# Altium PCB main_PCB.PcbDoc
Units mil, origin at the board's own origin, x right, y up, seen from the top; angles counter-clockwise.
Board outline 2000 x 1574.8 mil, 2 copper layers (Top Layer, Bottom Layer); 9 components, 9 nets, 76 pads, 2 vias.
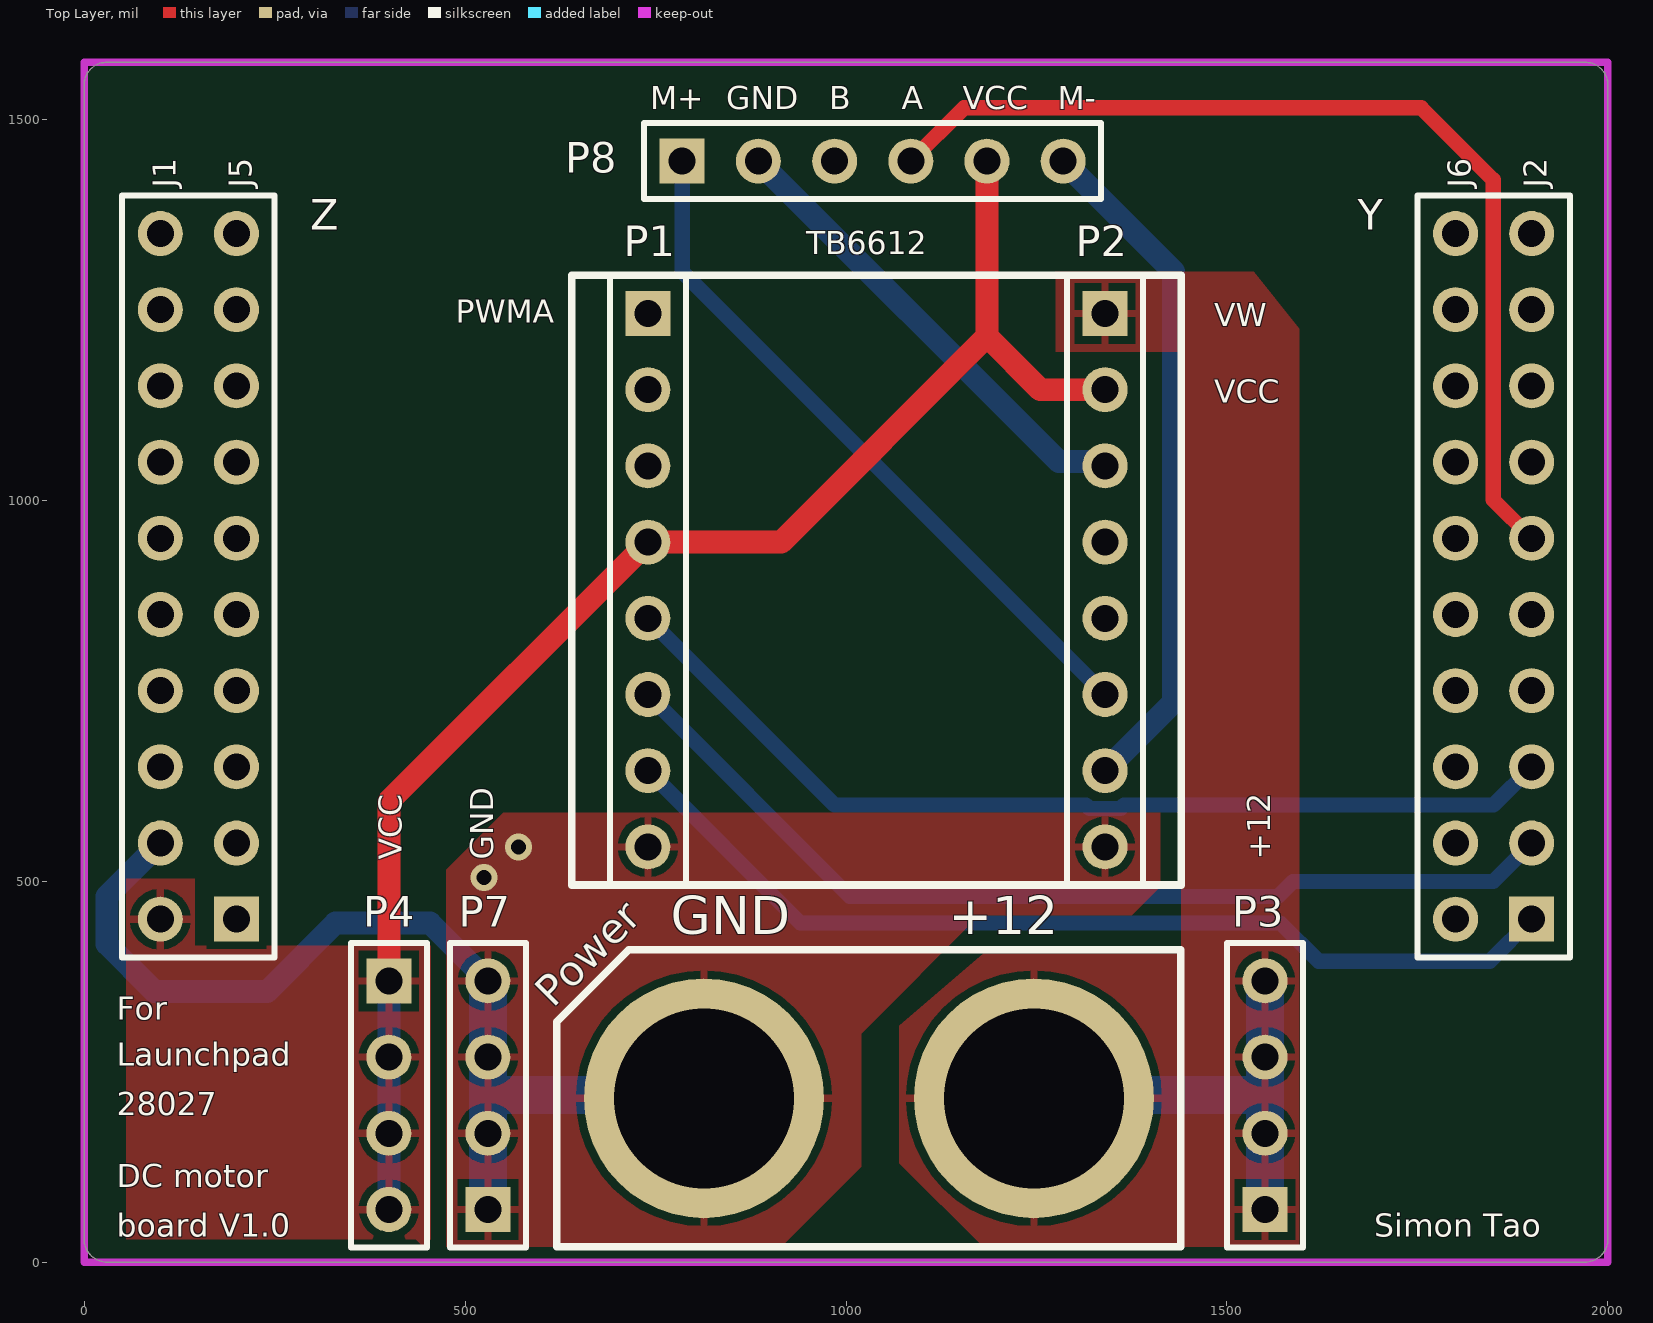
[diagram p0: Top Layer view]
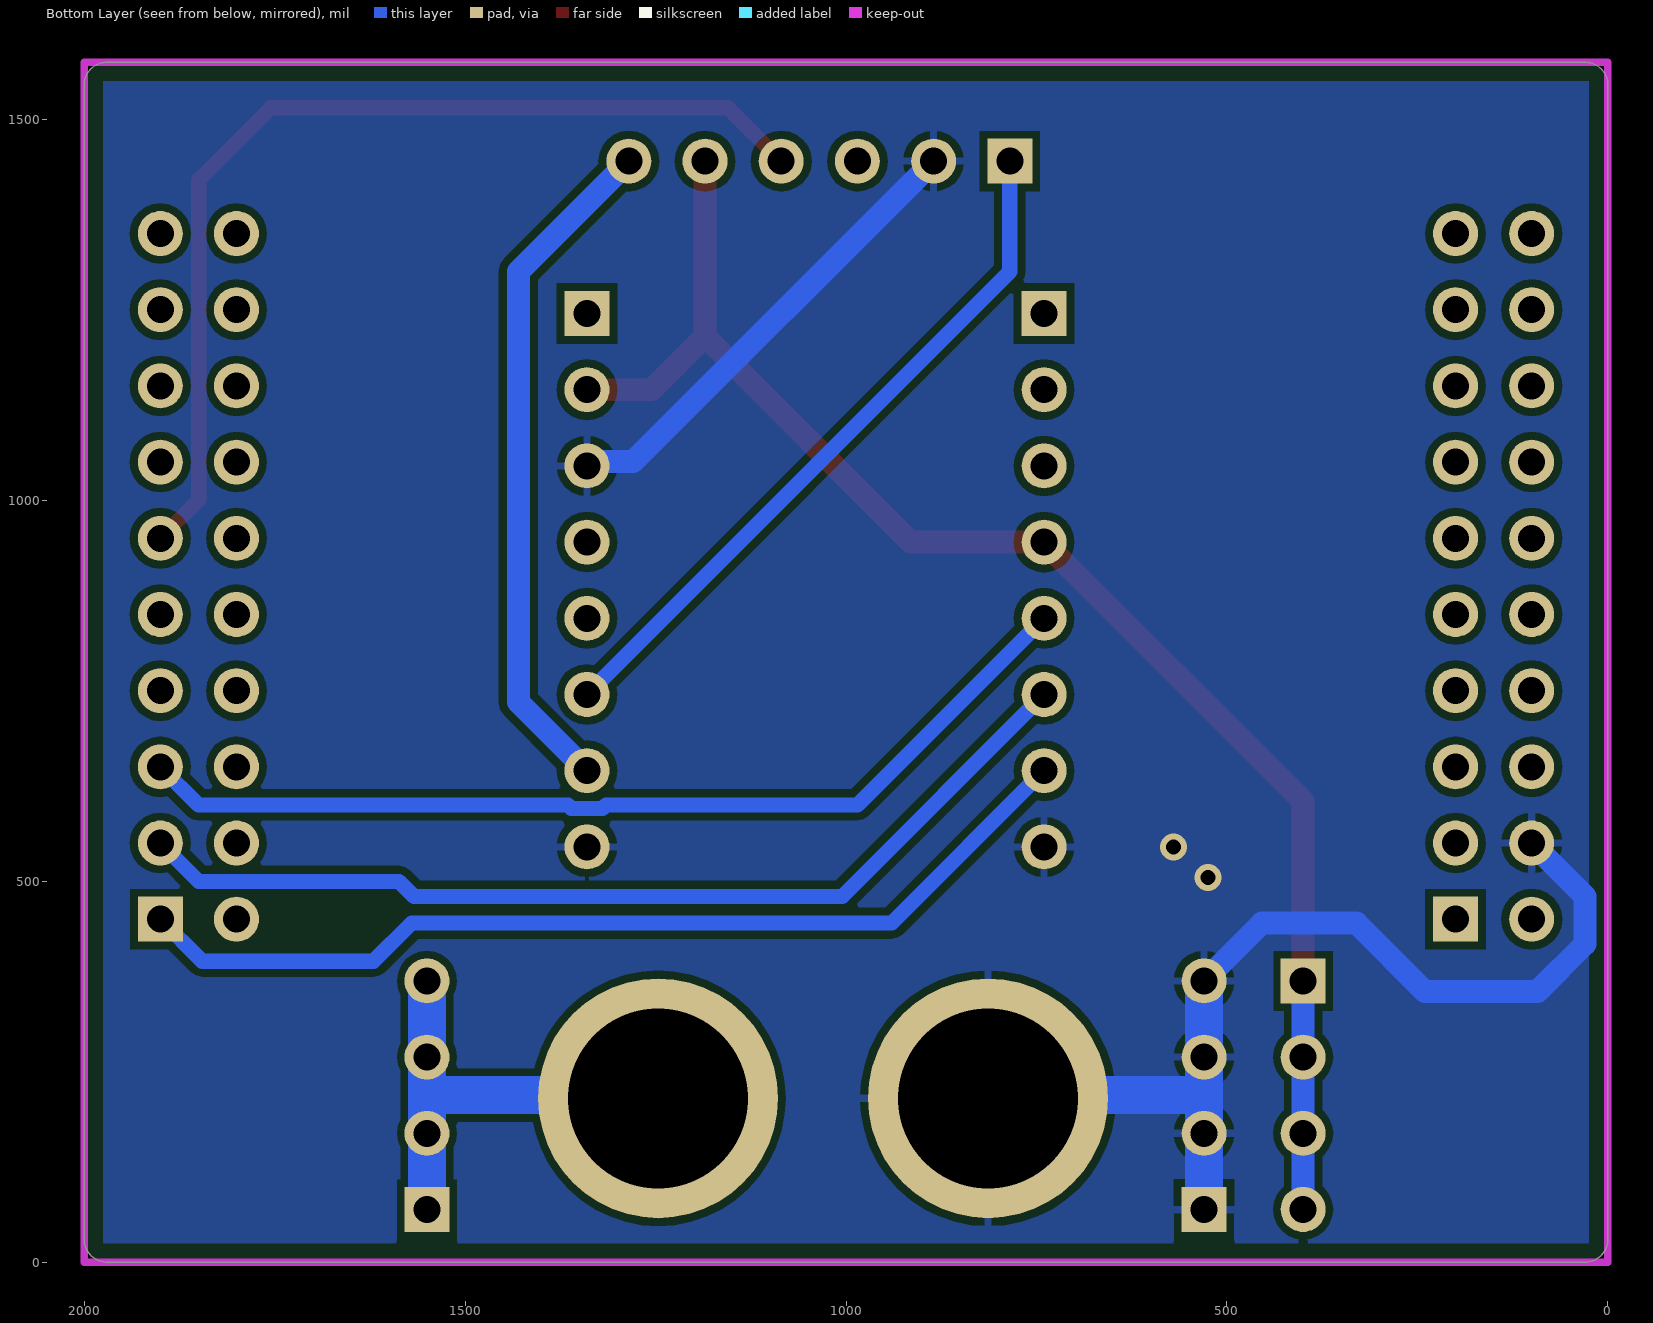
[diagram p1: Bottom Layer view, seen from below]

## Layer stack, top to bottom
Top Solder: solder mask 0.4, Solder Resist, Dk 3.5
Top Layer: signal copper 1.4
Dielectric 1: dielectric 12.6, FR-4, Dk 4.8
Bottom Layer: signal copper 1.4
Bottom Solder: solder mask 0.4, Solder Resist, Dk 3.5

## Board outline
0,30 0,1544.8 cw(c30,1544.8) 30,1574.8 1970,1574.8 cw(c1970,1544.8) 2000,1544.8 2000,30 cw(c1970,30) 1970,0 30,0 cw(c30,30)

## Design rules (kind name [scope] priority, off if disabled: settings)
Clearance [All] p1: gap=10 ignorepadtopadclearanceinfootprint=FALSE except(0: Arc-Hole Track-Hole SMDPad-Hole THPad-Hole Via-Hole Fill-Hole Poly-Hole Region-Hole Text-Hole)
PolygonConnect [All] p1: connectstyle=Relief reliefconductorwidth=10 reliefentries=4 polygonreliefangle="90 Angle" airgapwidth=10
RoutingVias [All] p1: holewidth=28 width=50 viastyle="Through Hole" minholewidth=28 minwidth=50 maxholewidth=28 maxwidth=50
SolderMaskExpansion [All] p1: expansion=4 istentingtop=FALSE
Width Width_1 [InNet('VCC')] p1: maxlimit=30 minlimit=10 preferedwidth=30
Width [All] p2: maxlimit=100 minlimit=10 preferedwidth=20
30 further rules are at their usual default settings.

## Components (designator, comment, footprint, x,y, rotation, side; value= is the part's Value field where it differs from the comment)
P1 "Header 8" HDR1X8 740,1244.96 r270 top
P2 "Header 8" HDR1X8 1340,1245 r270 top
P3 "Header 4" HDR1X4 1550,69.06 r90 top
P4 "Header 4" HDR1X4 400,369.06 r270 top
P7 "Header 4" HDR1X4 530,69.06 r90 top
P8 "Header 6" HDR1X6 785,1445 r0 top
Power "TX60" PCBComponent_1 1030,215 r0 top
Y "Header 10X2" HDR2X10 1900,450 r90 top
Z "Header 10X2" HDR2X10 200,450 r90 top

## Footprints (in the part's own frame and the unit in brackets; to place one, negate y for a bottom-side part, rotate by r counter-clockwise, add the part's x,y. Pads: shape width x height; smd on the part's side, far side on the other; paste and mask are expansions set on the pad)
HDR1X4 [mm] "Connector; Header; 4 Position"
  rect 1.5x1.5 hole 0.9: 1(0,0)
  round 1.5 hole 0.9: 2(2.54,0) 3(5.08,0) 4(7.62,0)
  silkscreen extent -1.27,-1.27 8.89,1.27
HDR1X6 [mm] "Connector; Header; 6 Position"
  rect 1.5x1.5 hole 0.9: 1(0,0)
  round 1.5 hole 0.9: 2(2.54,0) 3(5.08,0) 4(7.62,0) 5(10.16,0) 6(12.7,0)
  silkscreen extent -1.27,-1.27 13.97,1.27
HDR1X8 [mm] "Connector; Header; 8 Position"
  rect 1.5x1.5 hole 0.9: 1(0,0)
  round 1.5 hole 0.9: 2(2.54,0) 3(5.08,0) 4(7.62,0) 5(10.16,0) 6(12.7,0) 7(15.24,0) 8(17.78,0)
  silkscreen extent -1.27,-1.27 19.05,1.27
HDR2X10 [mm] "Connector; Header; 10x2 Position"
  rect 1.5x1.5 hole 0.9: 1(0,0)
  round 1.5 hole 0.9: 2(0,2.54) 3(2.54,0) 4(2.54,2.54) 5(5.08,0) 6(5.08,2.54) 7(7.62,0) 8(7.62,2.54) 9(10.16,0) 10(10.16,2.54) 11(12.7,0) 12(12.7,2.54) 13(15.24,0) 14(15.24,2.54) 15(17.78,0) 16(17.78,2.54) 17(20.32,0) 18(20.32,2.54) 19(22.86,0) 20(22.86,2.54)
  silkscreen extent -1.27,-1.27 24.13,3.81
PCBComponent_1 [mm]
  round 8 hole 6: 1(-5.5,0) 2(5.5,0)
  silkscreen extent -10.4,-4.95 10.4,4.95

## Part data
P1 P2: "Header, 8-Pin", LatestRevisionDate=17-Jul-2002, LatestRevisionNote="Re-released for DXP Platform.", Publisher="Altium Limited"
P3 P4 P7: "Header, 4-Pin", LatestRevisionDate=17-Jul-2002, LatestRevisionNote="Re-released for DXP Platform.", Publisher="Altium Limited"
P8: "Header, 6-Pin", LatestRevisionDate=17-Jul-2002, LatestRevisionNote="Re-released for DXP Platform.", Publisher="Altium Limited"
Y Z: "Header, 10-Pin, Dual row", LatestRevisionDate=17-Jul-2002, LatestRevisionNote="Re-released for DXP Platform.", Publisher="Altium Limited"

## Via types
v1: diameter 35.43, hole 19.68, Top Layer to Bottom Layer, tented both sides, 2 vias

## Nets (pads, with @x,y where several pads share a name; then routed paths per layer and width w, separated by ;. In a path a pad name is that pad's centre, name@x,y a point inside that pad or via, vN(x,y) a via of type N, cw(c..) or ccw(c..) an arc to the next point about the centre after c; other vN are vias at no path point)
+12: P2.1 P3.1 P3.2 P3.3 P3.4 Power.2 | length 605.1
  Bottom Layer w50: Power.2 1250.59,219.06 1550,219.06 ; P3.1 P3.2 1550,219.06 ; P3.4 P3.3 1550,219.06
A: P8.4 Y.11 | length 1324.1
  Top Layer w20: P8.4 1155,1515 1755,1515 1849.53,1420.47 1849.53,1000.47 Y.11
B01: P2.7 P8.6 | length 897.3
  Bottom Layer w30: P8.6 1430,1300 1430,735 P2.7
B02: P2.6 P8.1 | length 929.9
  Bottom Layer w20: P8.1 785,1300 P2.6
BIN1: P1.5 Y.5 | length 1285.9
  Bottom Layer w20: P1.5 984.96,600 1314.96,600 1319.49,595.47 1360.51,595.47 1365.04,600 1850,600 Y.5
BIN2: P1.6 Y.3 | length 1298.7
  Bottom Layer w20: P1.6 1004.96,480 1567.01,480 1586.53,499.53 1849.53,499.53 Y.3
GND: P1.8 P2.3 P2.8 P7.1 P7.2 P7.3 P7.4 P8.2 Power.1 Z.4 | length 1961.9
  Bottom Layer w30: Z.4 30,480 30,417.57 92.57,355 240,355 330,445 454.06,445 P7.4 ; P8.2 1279.44,1050.56 1334.44,1050.56 P2.3
  Bottom Layer w50: P7.1 P7.2 530,219.06 ; P7.4 P7.3 530,219.06 ; Power.1 809.41,219.06 530,219.06
  other v1: 525,505 570,545
PWMB: P1.7 Y.1 | length 1286.3
  Bottom Layer w20: P1.7 939.96,445 1570,445 1620,395 1845,395 Y.1
VCC: P1.4 P2.2 P4.1 P4.2 P4.3 P4.4 P8.5 Z.2 | length 1987.6
  Top Layer w30: P4.1 400,604.96 P1.4 914.96,944.96 1185,1215 ; P8.5 1185,1215 ; P2.2 1255,1145 1185,1215
  Bottom Layer w30: P4.4 P4.3 P4.2 P4.1
pads on no net: P1.1 P1.2 P1.3 P2.4 P2.5 P8.3 Y.2 Y.4 Y.6 Y.7 Y.8 Y.9 Y.10 Y.12 Y.13 Y.14 Y.15 Y.16 Y.17 Y.18 Y.19 Y.20 Z.1 Z.3 Z.5 Z.6 Z.7 Z.8 Z.9 Z.10 Z.11 Z.12 Z.13 Z.14 Z.15 Z.16 Z.17 Z.18 Z.19 Z.20

## Polygon pours and split planes (outlines as drawn)
VCC on Top Layer "VCC_L01_P005" (solid, remove dead copper, pour order 5): 55,502.94 145,502.94 145,415 455,415 455,30 445,20 435,30 55,30 55,390 55,400
GND on Top Layer "GND_L01_P004" (solid, remove dead copper, pour order 4): 475,500 475,20 915,20 1020,125 1020,300 1175,455 1375,455 1412.5,492.5 1412.5,590 550,590 525,565 475,515
+12 on Top Layer "+12_L01_P003" (solid, remove dead copper, pour order 3): 1180,405 1435,405 1440,410 1440,1195 1275,1195 1275,1300 1535,1300 1595,1225 1595,20 1180,20 1070,130 1070,310 1075,315
GND on Bottom Layer "GND_L02_P006" (solid, remove dead copper, pour order 6): 25,1550 25,25 1975,25 1975,1550

## Keep-outs
Keep-Out Layer:
  lines w10: 0,0 0,1575 2000,1575 2000,0 0,0

## Silkscreen, mask and mechanical layers (free items; w line width, h text height)
Top Overlay:
  lines w10: 640,495 1440,495 1440,1295 640,1295 640,495
  text "M+" at 743,1513 h30
  text "GND" at 843,1513 h30
  text "B" at 978,1513 h30
  text "A" at 1073,1513 h30
  text "VCC" at 1153,1513 h30
  text "M-" at 1278,1513 h30
  text "TB6612" at 948,1323 h30
  text "PWMA" at 488,1233 h30
  text "VW" at 1483,1228 h30
  text "VCC" at 1483,1128 h30
  text "VCC" at 417,528 h30 r90
  text "GND" at 537,528 h30 r90
  text "+12" at 1557,528 h30 r90
  text "GND" at 770,430 h50
  text "+12" at 1135,430 h50
  text "For" at 43,318 h30
  text "Launchpad" at 43,258 h30
  text "28027" at 43,193 h30
  text "DC motor" at 43,98 h30
  text "board V1.0" at 43,33 h30
  text "Simon Tao" at 1693,33 h30
Mechanical 1:
  the board outline again, w10

## Text inside footprints (layer, text, board x,y; h text height)
Y: Top Overlay "J6" at 1820,1410 h30 r90; Top Overlay "J2" at 1920,1410 h30 r90
Z: Top Overlay "J5" at 220,1410 h30 r90; Top Overlay "J1" at 120,1410 h30 r90